# EAGLE board canSlaveV06a_nutzen (EAGLE 7.2.0), part 1 of 4
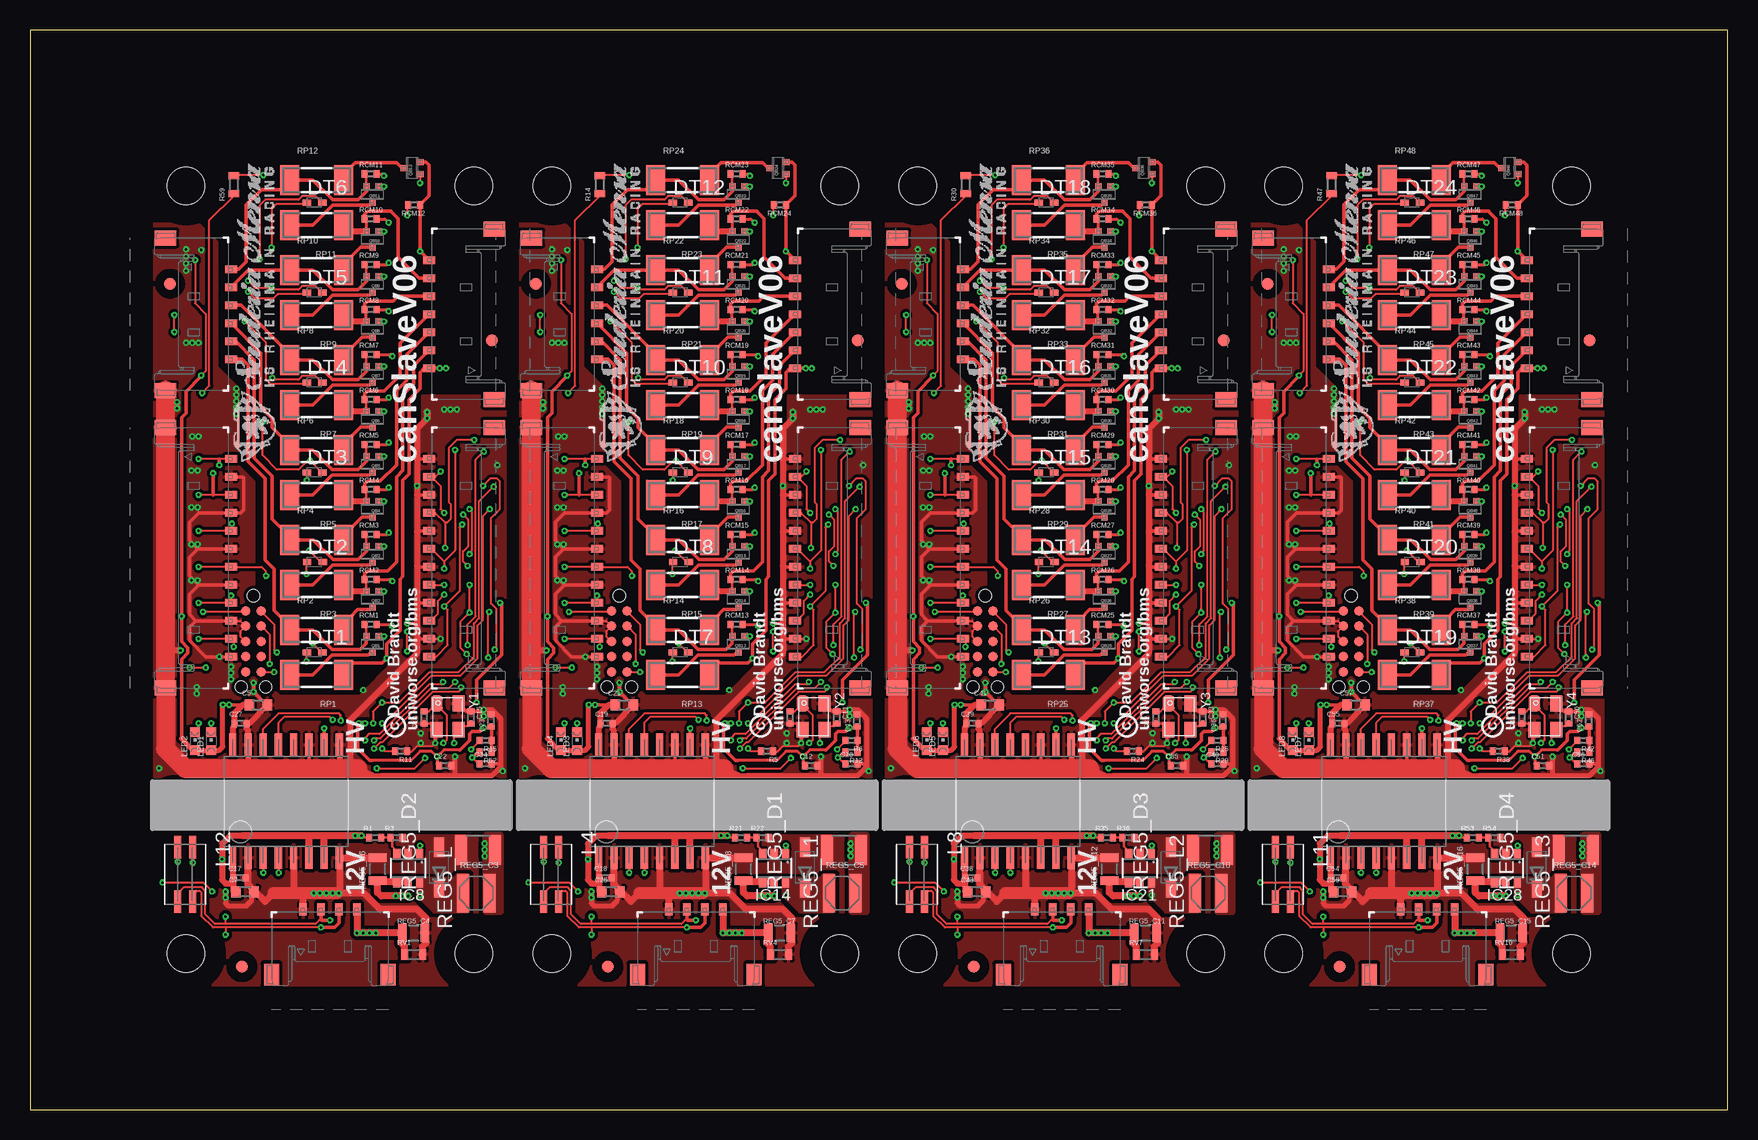
[diagram p0: board, top side]
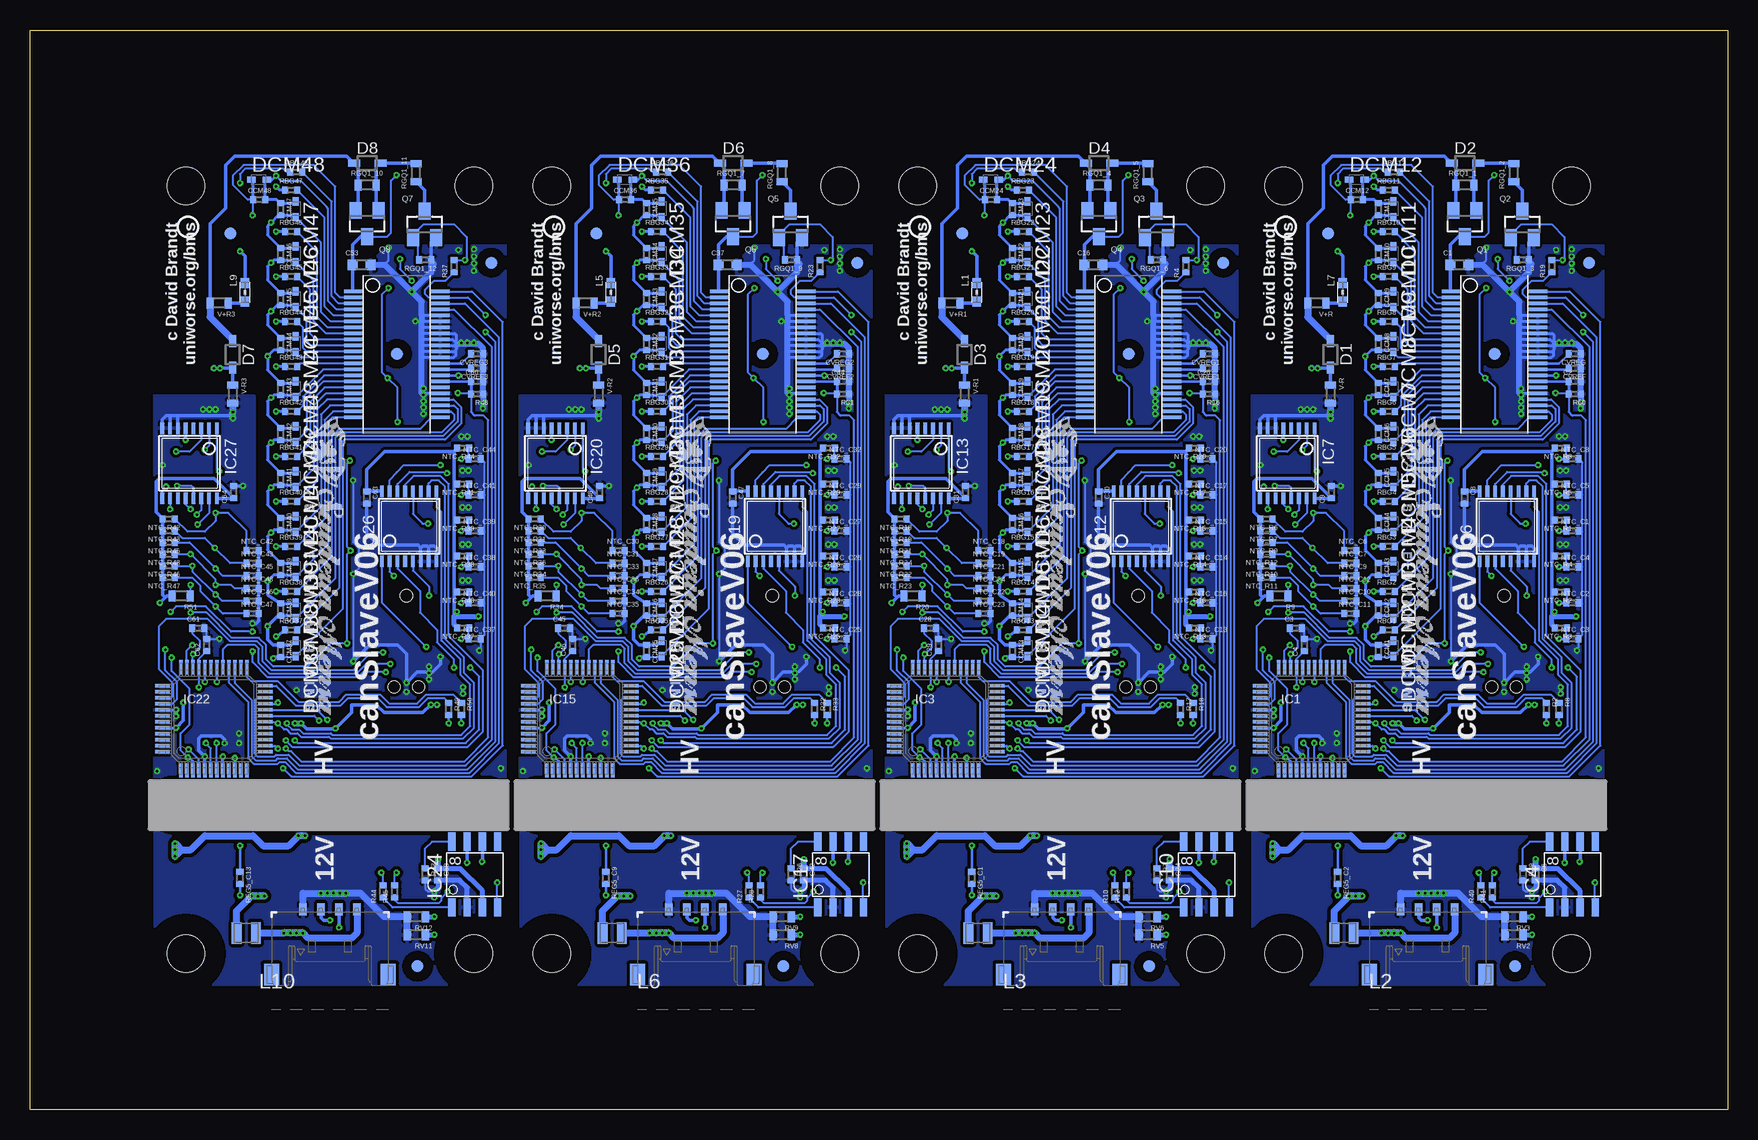
[diagram p1: board, bottom side, seen from below]

Size 141.5 x 90 mm. Coordinates in mm from the lower left corner, seen from the top.
Outline: 0,0 141.5,0 141.5,90 0,90 0,0
Copper layers (1*16): Top 0.035mm / dielectric 1.5mm / Bottom 0.035mm
Design rules "PCB-POOL Standard *": minimum track width 0.15mm, minimum drill 0.2mm, track to track 0.15mm, track to pad 0.15mm, pad to pad 0.15mm, via to via 0.15mm, smd to smd 0mil, copper to edge 0.3mm, drill to drill 0.2mm, minimum pad ring 0.2mm, minimum via ring 0.15mm, stop-mask expansion 0.075mm, vias tented up to drill 0.31mm, thermal gap 0.2mm
Holes 3.1 mm at 37,13 13,13 37,77 13,77 67.5,13 43.5,13 67.5,77 43.5,77 98,13 74,13 98,77 74,77 128.5,13 104.5,13 128.5,77 104.5,77
tRestrict: area 34,10 to 40,16; area 10,10 to 16,16; area 34,74 to 40,80; area 10,74 to 16,80; area 64.5,10 to 70.5,16; area 40.5,10 to 46.5,16; area 64.5,74 to 70.5,80; area 40.5,74 to 46.5,80; area 95,10 to 101,16; area 71,10 to 77,16; area 95,74 to 101,80; area 71,74 to 77,80; 4 more areas; 13 lines
bRestrict: area 34,10 to 40,16; area 10,10 to 16,16; area 34,74 to 40,80; area 10,74 to 16,80; area 64.5,10 to 70.5,16; area 40.5,10 to 46.5,16; area 64.5,74 to 70.5,80; area 40.5,74 to 46.5,80; area 95,10 to 101,16; area 71,10 to 77,16; area 95,74 to 101,80; area 71,74 to 77,80; 4 more areas; 11 lines

## Footprints (pad centres in the part's own frame; a part is rotated, then mirrored left to right if it is on the bottom)
C0603 = smd 0.8 x 0.9: 1 -0.75,0; 2 0.75,0
C0402 = smd 0.5 x 0.6: 1 -0.5,0; 2 0.5,0
SOD323-L = smd 1 x 0.6: A 1.1,0; C -1.1,0
TC2050-NL-JTORDER = smd 0.787 x 0.787: 1 -2.54,-0.635; 2 -2.54,0.635; 3 -1.27,-0.635; 4 -1.27,0.635; 5 0,-0.635; 6 0,0.635; 7 1.27,-0.635; 8 1.27,0.635; 9 2.54,-0.635; 10 2.54,0.635 | hole 0.991: 3.81,1.016; 3.81,-1.016; -3.81,0
SOD523 = smd 0.7 x 0.5: A 0.65,0; C -0.65,0
FIDUCIAL_1MM = smd 1 x 1: 1 0,0
LQFP48 = smd 0.28 x 1.2: 1 -2.75,-4.3; 2 -2.25,-4.3; 3 -1.75,-4.3; 4 -1.25,-4.3; 5 -0.75,-4.3; 6 -0.25,-4.3; 7 0.25,-4.3; 8 0.75,-4.3; 9 1.25,-4.3; 10 1.75,-4.3; 11 2.25,-4.3; 12 2.75,-4.3; 25 2.75,4.3; 26 2.25,4.3; 27 1.75,4.3; 28 1.25,4.3; 29 0.75,4.3; 30 0.25,4.3; 31 -0.25,4.3; 32 -0.75,4.3; 33 -1.25,4.3; 34 -1.75,4.3; 35 -2.25,4.3; 36 -2.75,4.3 | smd 1.2 x 0.28: 13 4.3,-2.75; 14 4.3,-2.25; 15 4.3,-1.75; 16 4.3,-1.25; 17 4.3,-0.75; 18 4.3,-0.25; 19 4.3,0.25; 20 4.3,0.75; 21 4.3,1.25; 22 4.3,1.75; 23 4.3,2.25; 24 4.3,2.75; 37 -4.3,2.75; 38 -4.3,2.25; 39 -4.3,1.75; 40 -4.3,1.25; 41 -4.3,0.75; 42 -4.3,0.25; 43 -4.3,-0.25; 44 -4.3,-0.75; 45 -4.3,-1.25; 46 -4.3,-1.75; 47 -4.3,-2.25; 48 -4.3,-2.75
44SSOP = smd 1.6 x 0.28: 1 -3.6,5.25; 2 -3.6,4.75; 3 -3.6,4.25; 4 -3.6,3.75; 5 -3.6,3.25; 6 -3.6,2.75; 7 -3.6,2.25; 8 -3.6,1.75; 9 -3.6,1.25; 10 -3.6,0.75; 11 -3.6,0.25; 12 -3.6,-0.25; 13 -3.6,-0.75; 14 -3.6,-1.25; 15 -3.6,-1.75; 16 -3.6,-2.25; 17 -3.6,-2.75; 18 -3.6,-3.25; 19 -3.6,-3.75; 20 -3.6,-4.25; 21 -3.6,-4.75; 22 -3.6,-5.25; 23 3.6,-5.25; 24 3.6,-4.75; 25 3.6,-4.25; 26 3.6,-3.75; 27 3.6,-3.25; 28 3.6,-2.75; 29 3.6,-2.25; 30 3.6,-1.75; 31 3.6,-1.25; 32 3.6,-0.75; 33 3.6,-0.25; 34 3.6,0.25; 35 3.6,0.75; 36 3.6,1.25; 37 3.6,1.75; 38 3.6,2.25; 39 3.6,2.75; 40 3.6,3.25; 41 3.6,3.75; 42 3.6,4.25; 43 3.6,4.75; 44 3.6,5.25
SO-8 = smd 1.524 x 0.61: 1 -2.743,1.905; 2 -2.743,0.635; 3 -2.743,-0.635; 4 -2.743,-1.905; 5 2.743,-1.905; 6 2.743,-0.635; 7 2.743,0.635; 8 2.743,1.905
SO16WB = smd 1.9 x 0.6: P$1 -4.7,4.445; P$2 -4.7,3.175; P$3 -4.7,1.905; P$4 -4.7,0.635; P$5 -4.7,-0.635; P$6 -4.7,-1.905; P$7 -4.7,-3.175; P$8 -4.7,-4.445; P$9 4.7,-4.445; P$10 4.7,-3.175; P$11 4.7,-1.905; P$12 4.7,-0.635; P$13 4.7,0.635; P$14 4.7,1.905; P$15 4.7,3.175; P$16 4.7,4.445
TSSOP16 = smd 0.305 x 0.991: 1 -2.275,-2.918; 2 -1.625,-2.918; 3 -0.975,-2.918; 4 -0.325,-2.918; 5 0.325,-2.918; 6 0.975,-2.918; 7 1.625,-2.918; 8 2.275,-2.918; 9 2.275,2.918; 10 1.625,2.918; 11 0.975,2.918; 12 0.325,2.918; 13 -0.325,2.918; 14 -0.975,2.918; 15 -1.625,2.918; 16 -2.275,2.918
SOT23-6 = smd 0.6 x 0.9: 1 -0.95,-1.15; 2 0,-1.15; 3 0.95,-1.15; 4 0.95,1.15; 5 0,1.15; 6 -0.95,1.15
0603 = smd 0.85 x 0.7: 1 -0.775,0; 2 0.775,0
WE-PMI_0806 = smd 0.8 x 1.8: 1 -0.8,0; 2 0.8,0
WE-SLM = smd 1.85 x 0.6: 1 -2.28,0.63; 2 -2.28,-0.62; 3 2.27,-0.62; 4 2.27,0.63
CHIPLED_0603 = smd 0.8 x 0.8: A 0,-0.75; C 0,0.75
R0402 = smd 0.5 x 0.6: 1 -0.5,0; 2 0.5,0
SOT23 = smd 1 x 1.4: 1 -0.95,-1.1; 2 0.95,-1.1; 3 0,1.1
SOT416 = smd 0.5 x 0.6: 1 -0.5,-0.65; 2 0.5,-0.65; 3 0,0.65
R0603 = smd 0.6 x 0.9: 1 -0.75,0; 2 0.75,0
C1210 = smd 1 x 2.5: 1 -1.4,0; 2 1.4,0
C0805 = smd 0.7 x 1.5: 1 -0.95,0; 2 0.95,0
SOD123 = smd 1.6 x 0.8: 1 -1.7,0; 2 1.7,0
WE-TPC_2828 = smd 3.2 x 1: 1 0,1.1; 2 0,-1.1
MINI_MELF-0207R = smd 1.6 x 2.5: 1 -2.25,0; 2 2.25,0
504050-0791 = smd 0.6 x 1: 1 -4.5,-0.25; 2 -3,-0.25; 3 -1.5,-0.25; 4 0,-0.25; 5 1.5,-0.25; 6 3,-0.25; 7 4.5,-0.25 | smd 1.25 x 1.8: P1 -7.105,5.2; P2 7.105,5.2
504050-0691 = smd 0.6 x 1: 1 -3.75,-0.25; 2 -2.25,-0.25; 3 -0.75,-0.25; 4 0.75,-0.25; 5 2.25,-0.25; 6 3.75,-0.25 | smd 1.25 x 1.8: P1 -6.355,5.2; P2 6.355,5.2
504050-0491 = smd 0.6 x 1: 1 -2.25,-0.25; 2 -0.75,-0.25; 3 0.75,-0.25; 4 2.25,-0.25 | smd 1.25 x 1.8: P1 -4.855,5.2; P2 4.855,5.2
504050-1291 = smd 0.6 x 1: 1 -8.25,-0.25; 2 -6.75,-0.25; 3 -5.25,-0.25; 4 -3.75,-0.25; 5 -2.25,-0.25; 6 -0.75,-0.25; 7 0.75,-0.25; 8 2.25,-0.25; 9 3.75,-0.25; 10 5.25,-0.25; 11 6.75,-0.25; 12 8.25,-0.25 | smd 1.25 x 1.8: P1 -10.855,5.2; P2 10.855,5.2
MT = smd 1.3 x 1: P1 -1.1,-0.9; P2 1.1,-0.9; P3 1.1,0.9; P4 -1.1,0.9

## Placement (x,y rotation side)
C1  100n,100V  [C0603]  22.36,70.42 0 bottom
C2  100n  [C0402]  12.75,60.7 0 bottom
C3  100n  [C0402]  35.98,40.12 0 bottom
C4  100n  [C0402]  35.27,38.73 90 bottom
C5  10u,10V,X7R  [C0603]  19.02,33.73 0 top
C6  100n,>10V,X7R  [C0402]  16,19.6 270 bottom
C7  10u,10V,X7R  [C0603]  17.93,18.15 0 top
C8  100n,>10V,X7R  [C0402]  21.93,51.02 270 bottom
C9  100n,>10V,X7R  [C0402]  33.02,51.48 90 bottom
C10  10p  [C0402]  63.35,32.67 90 top
C11  10p  [C0402]  67.25,32.67 270 top
C12  100n  [C0402]  65.1,28.68 0 top
C13  100n  [C0402]  68.92,32.42 90 top
C14  10p  [C0402]  32.85,32.67 90 top
C15  10p  [C0402]  36.75,32.67 270 top
C16  100n,100V  [C0603]  52.86,70.42 0 bottom
C17  100n,>10V,X7R  [C0402]  17.48,19.32 0 top
C18  100n,>10V,X7R  [C0402]  47.98,19.32 0 top
C19  100n,>10V,X7R  [C0402]  48.05,32.2 0 top
C20  100n  [C0402]  68.47,28.82 0 top
C21  10u,10V,X7R  [C0603]  49.52,33.73 0 top
C22  100n  [C0402]  34.6,28.68 0 top
C23  100n  [C0402]  38.42,32.42 90 top
C24  100n,>10V,X7R  [C0402]  46.5,19.6 270 bottom
C25  10u,10V,X7R  [C0603]  48.42,18.15 0 top
C26  100n  [C0402]  43.25,60.7 0 bottom
C27  100n,>10V,X7R  [C0402]  17.55,32.2 0 top
C28  100n  [C0402]  66.47,40.12 0 bottom
C29  100n  [C0402]  65.78,38.73 90 bottom
C30  100n,>10V,X7R  [C0402]  52.42,51.02 270 bottom
C31  100n,>10V,X7R  [C0402]  63.52,51.48 90 bottom
C32  10p  [C0402]  93.85,32.67 90 top
C33  10p  [C0402]  97.75,32.67 270 top
C34  100n  [C0402]  37.98,28.82 0 top
C35  100n  [C0402]  95.6,28.68 0 top
C36  100n  [C0402]  99.42,32.42 90 top
C37  100n,100V  [C0603]  83.36,70.42 0 bottom
C38  100n,>10V,X7R  [C0402]  78.47,19.32 0 top
C39  100n,>10V,X7R  [C0402]  78.55,32.2 0 top
C40  100n  [C0402]  98.97,28.82 0 top
C41  10u,10V,X7R  [C0603]  80.03,33.73 0 top
C42  100n,>10V,X7R  [C0402]  77,19.6 270 bottom
C43  10u,10V,X7R  [C0603]  78.92,18.15 0 top
C44  100n  [C0402]  73.75,60.7 0 bottom
C45  100n  [C0402]  96.97,40.12 0 bottom
C46  100n  [C0402]  96.28,38.73 90 bottom
C47  100n,>10V,X7R  [C0402]  82.92,51.02 270 bottom
C48  100n,>10V,X7R  [C0402]  94.03,51.48 90 bottom
C49  10p  [C0402]  124.35,32.67 90 top
C50  10p  [C0402]  128.25,32.67 270 top
C51  100n  [C0402]  126.1,28.68 0 top
C52  100n  [C0402]  129.93,32.42 90 top
C53  100n,100V  [C0603]  113.86,70.42 0 bottom
C54  100n,>10V,X7R  [C0402]  108.97,19.32 0 top
C55  100n,>10V,X7R  [C0402]  109.05,32.2 0 top
C56  100n  [C0402]  129.47,28.82 0 top
C57  10u,10V,X7R  [C0603]  110.53,33.73 0 top
C58  100n,>10V,X7R  [C0402]  107.5,19.6 270 bottom
C59  10u,10V,X7R  [C0603]  109.42,18.15 0 top
C60  100n  [C0402]  104.25,60.7 0 bottom
C61  100n  [C0402]  127.47,40.12 0 bottom
C62  100n  [C0402]  126.78,38.73 90 bottom
C63  100n,>10V,X7R  [C0402]  113.42,51.02 270 bottom
C64  100n,>10V,X7R  [C0402]  124.53,51.48 90 bottom
CCM1  100n  [C0402]  29.1,38.23 270 bottom
CCM2  100n  [C0402]  29.1,41.67 270 bottom
CCM3  100n  [C0402]  29.1,45.05 270 bottom
CCM4  100n  [C0402]  29.1,48.8 270 bottom
CCM5  100n  [C0402]  29.1,52.55 270 bottom
CCM6  100n  [C0402]  29.1,56.3 270 bottom
CCM7  100n  [C0402]  29.1,60.05 270 bottom
CCM8  100n  [C0402]  29.1,63.8 270 bottom
CCM9  100n  [C0402]  29.1,67.55 270 bottom
CCM10  100n  [C0402]  29.1,71.3 270 bottom
CCM11  100n  [C0402]  29.1,75.05 270 bottom
CCM12  100n  [C0402]  30.9,75.85 0 bottom
CCM13  100n  [C0402]  59.6,38.23 270 bottom
CCM14  100n  [C0402]  59.6,41.67 270 bottom
CCM15  100n  [C0402]  59.6,45.05 270 bottom
CCM16  100n  [C0402]  59.6,48.8 270 bottom
CCM17  100n  [C0402]  59.6,52.55 270 bottom
CCM18  100n  [C0402]  59.6,56.3 270 bottom
CCM19  100n  [C0402]  59.6,60.05 270 bottom
CCM20  100n  [C0402]  59.6,63.8 270 bottom
CCM21  100n  [C0402]  59.6,67.55 270 bottom
CCM22  100n  [C0402]  59.6,71.3 270 bottom
CCM23  100n  [C0402]  59.6,75.05 270 bottom
CCM24  100n  [C0402]  61.4,75.85 0 bottom
CCM25  100n  [C0402]  90.1,38.23 270 bottom
CCM26  100n  [C0402]  90.1,41.67 270 bottom
CCM27  100n  [C0402]  90.1,45.05 270 bottom
CCM28  100n  [C0402]  90.1,48.8 270 bottom
CCM29  100n  [C0402]  90.1,52.55 270 bottom
CCM30  100n  [C0402]  90.1,56.3 270 bottom
CCM31  100n  [C0402]  90.1,60.05 270 bottom
CCM32  100n  [C0402]  90.1,63.8 270 bottom
CCM33  100n  [C0402]  90.1,67.55 270 bottom
CCM34  100n  [C0402]  90.1,71.3 270 bottom
CCM35  100n  [C0402]  90.1,75.05 270 bottom
CCM36  100n  [C0402]  91.9,75.85 0 bottom
CCM37  100n  [C0402]  120.6,38.23 270 bottom
CCM38  100n  [C0402]  120.6,41.67 270 bottom
CCM39  100n  [C0402]  120.6,45.05 270 bottom
CCM40  100n  [C0402]  120.6,48.8 270 bottom
CCM41  100n  [C0402]  120.6,52.55 270 bottom
CCM42  100n  [C0402]  120.6,56.3 270 bottom
CCM43  100n  [C0402]  120.6,60.05 270 bottom
CCM44  100n  [C0402]  120.6,63.8 270 bottom
CCM45  100n  [C0402]  120.6,67.55 270 bottom
CCM46  100n  [C0402]  120.6,71.3 270 bottom
CCM47  100n  [C0402]  120.6,75.05 270 bottom
CCM48  100n  [C0402]  122.4,75.85 0 bottom
CVREF  1u  [C0402]  12.75,61.8 180 bottom
CVREF1  1u  [C0402]  43.25,61.8 180 bottom
CVREF2  1u  [C0402]  73.75,61.8 180 bottom
CVREF3  1u  [C0402]  104.25,61.8 180 bottom
CVREG  1u  [C0402]  12.75,63 180 bottom
CVREG1  1u  [C0402]  43.25,63 180 bottom
CVREG2  1u  [C0402]  73.75,63 180 bottom
CVREG3  1u  [C0402]  104.25,63 180 bottom
D1  51V  [SOD323-L]  33.1,62.95 270 bottom
D2  12V  [SOD323-L]  21.89,78.89 0 bottom
D3  51V  [SOD323-L]  63.6,62.95 270 bottom
D4  12V  [SOD323-L]  52.39,78.89 0 bottom
D5  51V  [SOD323-L]  94.1,62.95 270 bottom
D6  12V  [SOD323-L]  82.89,78.89 0 bottom
D7  51V  [SOD323-L]  124.6,62.95 270 bottom
D8  12V  [SOD323-L]  113.39,78.89 0 bottom
DBG1  JTAG10-TC2050-NL  [TC2050-NL-JTORDER]  18.62,39.02 270 top
DBG2  JTAG10-TC2050-NL  [TC2050-NL-JTORDER]  49.12,39.02 270 top
DBG3  JTAG10-TC2050-NL  [TC2050-NL-JTORDER]  79.62,39.02 270 top
DBG4  JTAG10-TC2050-NL  [TC2050-NL-JTORDER]  110.12,39.02 270 top
DCM1  7.5  [SOD523]  27.88,38.45 270 bottom
DCM2  7.5  [SOD523]  27.88,41.6 270 bottom
DCM3  7.5  [SOD523]  27.88,45.05 270 bottom
DCM4  7.5  [SOD523]  27.88,48.8 270 bottom
DCM5  7.5  [SOD523]  27.88,52.55 270 bottom
DCM6  7.5  [SOD523]  27.88,56.3 270 bottom
DCM7  7.5  [SOD523]  27.88,60.05 270 bottom
DCM8  7.5  [SOD523]  27.88,63.8 270 bottom
DCM9  7.5  [SOD523]  27.88,67.55 270 bottom
DCM10  7.5  [SOD523]  27.88,71.3 270 bottom
DCM11  7.5  [SOD523]  27.88,75.05 270 bottom
DCM12  7.5  [SOD523]  30.9,77.53 0 bottom
DCM13  7.5  [SOD523]  58.38,38.45 270 bottom
DCM14  7.5  [SOD523]  58.38,41.6 270 bottom
DCM15  7.5  [SOD523]  58.38,45.05 270 bottom
DCM16  7.5  [SOD523]  58.38,48.8 270 bottom
DCM17  7.5  [SOD523]  58.38,52.55 270 bottom
DCM18  7.5  [SOD523]  58.38,56.3 270 bottom
DCM19  7.5  [SOD523]  58.38,60.05 270 bottom
DCM20  7.5  [SOD523]  58.38,63.8 270 bottom
DCM21  7.5  [SOD523]  58.38,67.55 270 bottom
DCM22  7.5  [SOD523]  58.38,71.3 270 bottom
DCM23  7.5  [SOD523]  58.38,75.05 270 bottom
DCM24  7.5  [SOD523]  61.4,77.53 0 bottom
DCM25  7.5  [SOD523]  88.88,38.45 270 bottom
DCM26  7.5  [SOD523]  88.88,41.6 270 bottom
DCM27  7.5  [SOD523]  88.88,45.05 270 bottom
DCM28  7.5  [SOD523]  88.88,48.8 270 bottom
DCM29  7.5  [SOD523]  88.88,52.55 270 bottom
DCM30  7.5  [SOD523]  88.88,56.3 270 bottom
DCM31  7.5  [SOD523]  88.88,60.05 270 bottom
DCM32  7.5  [SOD523]  88.88,63.8 270 bottom
DCM33  7.5  [SOD523]  88.88,67.55 270 bottom
DCM34  7.5  [SOD523]  88.88,71.3 270 bottom
DCM35  7.5  [SOD523]  88.88,75.05 270 bottom
DCM36  7.5  [SOD523]  91.9,77.53 0 bottom
DCM37  7.5  [SOD523]  119.38,38.45 270 bottom
DCM38  7.5  [SOD523]  119.38,41.6 270 bottom
DCM39  7.5  [SOD523]  119.38,45.05 270 bottom
DCM40  7.5  [SOD523]  119.38,48.8 270 bottom
DCM41  7.5  [SOD523]  119.38,52.55 270 bottom
DCM42  7.5  [SOD523]  119.38,56.3 270 bottom
DCM43  7.5  [SOD523]  119.38,60.05 270 bottom
DCM44  7.5  [SOD523]  119.38,63.8 270 bottom
DCM45  7.5  [SOD523]  119.38,67.55 270 bottom
DCM46  7.5  [SOD523]  119.38,71.3 270 bottom
DCM47  7.5  [SOD523]  119.38,75.05 270 bottom
DCM48  7.5  [SOD523]  122.4,77.53 0 bottom
DT1  1PS79SB40  [SOD523]  23.73,38.12 0 top
DT2  1PS79SB40  [SOD523]  23.75,45.65 0 top
DT3  1PS79SB40  [SOD523]  23.73,53.12 0 top
DT4  1PS79SB40  [SOD523]  23.73,60.62 0 top
DT5  1PS79SB40  [SOD523]  23.73,68.12 0 top
DT6  1PS79SB40  [SOD523]  23.73,75.62 0 top
DT7  1PS79SB40  [SOD523]  54.23,38.12 0 top
DT8  1PS79SB40  [SOD523]  54.25,45.65 0 top
DT9  1PS79SB40  [SOD523]  54.23,53.12 0 top
DT10  1PS79SB40  [SOD523]  54.23,60.62 0 top
DT11  1PS79SB40  [SOD523]  54.23,68.12 0 top
DT12  1PS79SB40  [SOD523]  54.23,75.62 0 top
DT13  1PS79SB40  [SOD523]  84.72,38.12 0 top
DT14  1PS79SB40  [SOD523]  84.75,45.65 0 top
DT15  1PS79SB40  [SOD523]  84.72,53.12 0 top
DT16  1PS79SB40  [SOD523]  84.72,60.62 0 top
DT17  1PS79SB40  [SOD523]  84.72,68.12 0 top
DT18  1PS79SB40  [SOD523]  84.72,75.62 0 top
DT19  1PS79SB40  [SOD523]  115.22,38.12 0 top
DT20  1PS79SB40  [SOD523]  115.25,45.65 0 top
DT21  1PS79SB40  [SOD523]  115.22,53.12 0 top
DT22  1PS79SB40  [SOD523]  115.22,60.62 0 top
DT23  1PS79SB40  [SOD523]  115.22,68.12 0 top
DT24  1PS79SB40  [SOD523]  115.22,75.62 0 top
FID1  FIDUCIAL""  [FIDUCIAL_1MM]  48.17,11.91 90 top
FID2  FIDUCIAL""  [FIDUCIAL_1MM]  17.67,11.91 90 top
FID3  FIDUCIAL""  [FIDUCIAL_1MM]  38.52,64.12 90 top
FID4  FIDUCIAL""  [FIDUCIAL_1MM]  11.68,68.85 90 top
FID5  FIDUCIAL""  [FIDUCIAL_1MM]  69.02,64.12 90 top
FID6  FIDUCIAL""  [FIDUCIAL_1MM]  42.05,70.6 270 bottom
FID7  FIDUCIAL""  [FIDUCIAL_1MM]  11.55,70.6 270 bottom
FID8  FIDUCIAL""  [FIDUCIAL_1MM]  17.69,11.95 270 bottom
FID9  FIDUCIAL""  [FIDUCIAL_1MM]  19.4,63 270 bottom
FID10  FIDUCIAL""  [FIDUCIAL_1MM]  33.27,73.05 270 bottom
FID11  FIDUCIAL""  [FIDUCIAL_1MM]  48.19,11.95 270 bottom
FID12  FIDUCIAL""  [FIDUCIAL_1MM]  42.17,68.85 90 top
FID13  FIDUCIAL""  [FIDUCIAL_1MM]  49.9,63 270 bottom
FID14  FIDUCIAL""  [FIDUCIAL_1MM]  63.77,73.05 270 bottom
FID15  FIDUCIAL""  [FIDUCIAL_1MM]  78.67,11.91 90 top
FID16  FIDUCIAL""  [FIDUCIAL_1MM]  99.52,64.12 90 top
FID17  FIDUCIAL""  [FIDUCIAL_1MM]  72.55,70.6 270 bottom
FID18  FIDUCIAL""  [FIDUCIAL_1MM]  78.69,11.95 270 bottom
FID19  FIDUCIAL""  [FIDUCIAL_1MM]  72.67,68.85 90 top
FID20  FIDUCIAL""  [FIDUCIAL_1MM]  80.4,63 270 bottom
FID21  FIDUCIAL""  [FIDUCIAL_1MM]  94.28,73.05 270 bottom
FID22  FIDUCIAL""  [FIDUCIAL_1MM]  109.17,11.91 90 top
FID23  FIDUCIAL""  [FIDUCIAL_1MM]  130.01,64.12 90 top
FID24  FIDUCIAL""  [FIDUCIAL_1MM]  103.05,70.6 270 bottom
FID25  FIDUCIAL""  [FIDUCIAL_1MM]  109.19,11.95 270 bottom
FID26  FIDUCIAL""  [FIDUCIAL_1MM]  103.17,68.85 90 top
FID27  FIDUCIAL""  [FIDUCIAL_1MM]  110.9,63 270 bottom
FID28  FIDUCIAL""  [FIDUCIAL_1MM]  124.78,73.05 270 bottom
IC1  LPC11C14  [LQFP48]  34.67,32.58 0 bottom
IC2  LTC6803-4  [44SSOP]  19.43,62.96 0 bottom
IC3  LPC11C14  [LQFP48]  65.17,32.58 0 bottom
IC4  PCA82C251  [SO-8]  12.93,19.59 90 bottom
IC5  ADUM5201  [SO16WB]  21.35,25.7 90 top
IC6  4052-TSSOP16  [TSSOP16]  18.4,48.62 0 bottom
IC7  4052-TSSOP16  [TSSOP16]  36.7,53.88 180 bottom
IC8  LMR14203  [SOT23-6]  31.52,20.12 180 top
IC9  LTC6803-4  [44SSOP]  49.93,62.96 0 bottom
IC10  PCA82C251  [SO-8]  43.42,19.59 90 bottom
IC11  ADUM5201  [SO16WB]  51.85,25.7 90 top
IC12  4052-TSSOP16  [TSSOP16]  48.9,48.62 0 bottom
IC13  4052-TSSOP16  [TSSOP16]  67.2,53.88 180 bottom
IC14  LMR14203  [SOT23-6]  62.02,20.12 180 top
IC15  LPC11C14  [LQFP48]  95.67,32.58 0 bottom
IC16  LTC6803-4  [44SSOP]  80.43,62.96 0 bottom
IC17  PCA82C251  [SO-8]  73.92,19.59 90 bottom
IC18  ADUM5201  [SO16WB]  82.35,25.7 90 top
IC19  4052-TSSOP16  [TSSOP16]  79.4,48.62 0 bottom
IC20  4052-TSSOP16  [TSSOP16]  97.7,53.88 180 bottom
IC21  LMR14203  [SOT23-6]  92.53,20.12 180 top
IC22  LPC11C14  [LQFP48]  126.17,32.58 0 bottom
IC23  LTC6803-4  [44SSOP]  110.93,62.96 0 bottom
IC24  PCA82C251  [SO-8]  104.42,19.59 90 bottom
IC25  ADUM5201  [SO16WB]  112.85,25.7 90 top
IC26  4052-TSSOP16  [TSSOP16]  109.9,48.62 0 bottom
IC27  4052-TSSOP16  [TSSOP16]  128.2,53.88 180 bottom
IC28  LMR14203  [SOT23-6]  123.03,20.12 180 top
L1  WE-CBF,742792664  [0603]  62.58,68.13 270 bottom
L2  WE-PMI/74479776233A  [WE-PMI_0806]  31.98,14.72 180 bottom
L3  WE-PMI/74479776233A  [WE-PMI_0806]  62.48,14.72 180 bottom
L4  744242101  [WE-SLM]  43.42,19.6 270 top
L5  WE-CBF,742792664  [0603]  93.08,68.13 270 bottom
L6  WE-PMI/74479776233A  [WE-PMI_0806]  92.97,14.72 180 bottom
L7  WE-CBF,742792664  [0603]  32.08,68.13 270 bottom
L8  744242101  [WE-SLM]  73.92,19.6 270 top
L9  WE-CBF,742792664  [0603]  123.58,68.13 270 bottom
L10  WE-PMI/74479776233A  [WE-PMI_0806]  123.47,14.72 180 bottom
L11  744242101  [WE-SLM]  104.42,19.6 270 top
L12  744242101  [WE-SLM]  12.93,19.6 270 top
LED1  GRN  [CHIPLED_0603]  15.1,30.7 0 top
LED2  RED  [CHIPLED_0603]  13.75,30.7 0 top
LED3  GRN  [CHIPLED_0603]  45.6,30.7 0 top
LED4  RED  [CHIPLED_0603]  44.25,30.7 0 top
LED5  GRN  [CHIPLED_0603]  76.1,30.7 0 top
LED6  RED  [CHIPLED_0603]  74.75,30.7 0 top
LED7  GRN  [CHIPLED_0603]  106.6,30.7 0 top
LED8  RED  [CHIPLED_0603]  105.25,30.7 0 top
NTC_C1  1u  [C0402]  12.93,48.25 0 bottom
NTC_C2  1u  [C0402]  12.93,42.25 0 bottom
NTC_C3  1u  [C0402]  12.93,39.25 0 bottom
NTC_C4  1u  [C0402]  12.93,45.25 0 bottom
NTC_C5  1u  [C0402]  12.93,51.25 0 bottom
NTC_C6  1u  [C0402]  31.45,46.6 0 bottom
NTC_C7  1u  [C0402]  31.45,45.55 0 bottom
NTC_C8  1u  [C0402]  12.93,54.25 0 bottom
NTC_C9  1u  [C0402]  31.45,44.5 0 bottom
NTC_C10  1u  [C0402]  31.45,42.4 0 bottom
NTC_C11  1u  [C0402]  31.45,41.35 0 bottom
NTC_C12  1u  [C0402]  31.45,43.45 0 bottom
NTC_C13  1u  [C0402]  43.42,39.25 0 bottom
NTC_C14  1u  [C0402]  43.42,45.25 0 bottom
NTC_C15  1u  [C0402]  43.42,48.25 0 bottom
NTC_C16  1u  [C0402]  43.42,42.25 0 bottom
NTC_C17  1u  [C0402]  43.42,51.25 0 bottom
NTC_C18  1u  [C0402]  61.95,46.6 0 bottom
NTC_C19  1u  [C0402]  61.95,45.55 0 bottom
NTC_C20  1u  [C0402]  43.42,54.25 0 bottom
NTC_C21  1u  [C0402]  61.95,44.5 0 bottom
NTC_C22  1u  [C0402]  61.95,42.4 0 bottom
NTC_C23  1u  [C0402]  61.95,41.35 0 bottom
NTC_C24  1u  [C0402]  61.95,43.45 0 bottom
NTC_C25  1u  [C0402]  73.92,39.25 0 bottom
NTC_C26  1u  [C0402]  73.92,45.25 0 bottom
NTC_C27  1u  [C0402]  73.92,48.25 0 bottom
NTC_C28  1u  [C0402]  73.92,42.25 0 bottom
NTC_C29  1u  [C0402]  73.92,51.25 0 bottom
NTC_C30  1u  [C0402]  92.45,46.6 0 bottom
NTC_C31  1u  [C0402]  92.45,45.55 0 bottom
NTC_C32  1u  [C0402]  73.92,54.25 0 bottom
NTC_C33  1u  [C0402]  92.45,44.5 0 bottom
NTC_C34  1u  [C0402]  92.45,42.4 0 bottom
NTC_C35  1u  [C0402]  92.45,41.35 0 bottom
NTC_C36  1u  [C0402]  92.45,43.45 0 bottom
NTC_C37  1u  [C0402]  104.42,39.25 0 bottom
NTC_C38  1u  [C0402]  104.42,45.25 0 bottom
NTC_C39  1u  [C0402]  104.42,48.25 0 bottom
NTC_C40  1u  [C0402]  104.42,42.25 0 bottom
NTC_C41  1u  [C0402]  104.42,51.25 0 bottom
NTC_C42  1u  [C0402]  122.95,46.6 0 bottom
NTC_C43  1u  [C0402]  122.95,45.55 0 bottom
NTC_C44  1u  [C0402]  104.42,54.25 0 bottom
NTC_C45  1u  [C0402]  122.95,44.5 0 bottom
NTC_C46  1u  [C0402]  122.95,42.4 0 bottom
NTC_C47  1u  [C0402]  122.95,41.35 0 bottom
NTC_C48  1u  [C0402]  122.95,43.45 0 bottom
NTC_R1  10k  [R0402]  13.9,49.15 180 bottom
NTC_R2  10k  [R0402]  13.9,43.15 180 bottom
NTC_R3  10k  [R0402]  13.9,40.15 180 bottom
NTC_R4  10k  [R0402]  13.9,46.15 180 bottom
NTC_R5  10k  [R0402]  13.9,52.15 180 bottom
NTC_R6  10k  [R0402]  38.42,49.23 180 bottom
NTC_R7  10k  [R0402]  38.42,48.25 180 bottom
NTC_R8  10k  [R0402]  13.9,55.15 180 bottom
NTC_R9  10k  [R0402]  38.42,47.27 180 bottom
NTC_R10  10k  [R0402]  38.42,45.33 180 bottom
NTC_R11  10k  [R0402]  38.42,44.35 180 bottom
NTC_R12  10k  [R0402]  38.42,46.3 180 bottom
NTC_R13  10k  [R0402]  44.4,40.15 180 bottom
NTC_R14  10k  [R0402]  44.4,46.15 180 bottom
NTC_R15  10k  [R0402]  44.4,49.15 180 bottom
NTC_R16  10k  [R0402]  44.4,43.15 180 bottom
NTC_R17  10k  [R0402]  44.4,52.15 180 bottom
NTC_R18  10k  [R0402]  68.92,49.23 180 bottom
NTC_R19  10k  [R0402]  68.92,48.25 180 bottom
NTC_R20  10k  [R0402]  44.4,55.15 180 bottom
NTC_R21  10k  [R0402]  68.92,47.27 180 bottom
NTC_R22  10k  [R0402]  68.92,45.33 180 bottom
NTC_R23  10k  [R0402]  68.92,44.35 180 bottom
NTC_R24  10k  [R0402]  68.92,46.3 180 bottom
NTC_R25  10k  [R0402]  74.9,40.15 180 bottom
NTC_R26  10k  [R0402]  74.9,46.15 180 bottom
NTC_R27  10k  [R0402]  74.9,49.15 180 bottom
NTC_R28  10k  [R0402]  74.9,43.15 180 bottom
NTC_R29  10k  [R0402]  74.9,52.15 180 bottom
NTC_R30  10k  [R0402]  99.42,49.23 180 bottom
NTC_R31  10k  [R0402]  99.42,48.25 180 bottom
NTC_R32  10k  [R0402]  74.9,55.15 180 bottom
NTC_R33  10k  [R0402]  99.42,47.27 180 bottom
NTC_R34  10k  [R0402]  99.42,45.33 180 bottom
NTC_R35  10k  [R0402]  99.42,44.35 180 bottom
NTC_R36  10k  [R0402]  99.42,46.3 180 bottom
NTC_R37  10k  [R0402]  105.4,40.15 180 bottom
NTC_R38  10k  [R0402]  105.4,46.15 180 bottom
NTC_R39  10k  [R0402]  105.4,49.15 180 bottom
NTC_R40  10k  [R0402]  105.4,43.15 180 bottom
NTC_R41  10k  [R0402]  105.4,52.15 180 bottom
NTC_R42  10k  [R0402]  129.93,49.23 180 bottom
NTC_R43  10k  [R0402]  129.93,48.25 180 bottom
NTC_R44  10k  [R0402]  105.4,55.15 180 bottom
NTC_R45  10k  [R0402]  129.93,47.27 180 bottom
NTC_R46  10k  [R0402]  129.93,45.33 180 bottom
NTC_R47  10k  [R0402]  129.93,44.35 180 bottom
NTC_R48  10k  [R0402]  129.93,46.3 180 bottom
Q1  BSS84  [SOT23]  21.9,73.86 180 bottom
Q2  2N7002  [SOT23]  17.11,73.78 0 bottom
Q3  2N7002  [SOT23]  47.61,73.78 0 bottom
Q4  BSS84  [SOT23]  52.4,73.86 180 bottom
Q5  2N7002  [SOT23]  78.11,73.78 0 bottom
Q6  BSS84  [SOT23]  82.9,73.86 180 bottom
Q7  2N7002  [SOT23]  108.61,73.78 0 bottom
Q8  BSS84  [SOT23]  113.4,73.86 180 bottom
QB1  BSS84AKT  [SOT416]  28.55,38.8 180 top
QB2  BSS84AKT  [SOT416]  28.55,42.55 180 top
QB3  BSS84AKT  [SOT416]  28.55,46.3 180 top
QB4  BSS84AKT  [SOT416]  28.55,50.05 180 top
QB5  BSS84AKT  [SOT416]  28.55,53.8 180 top
QB6  BSS84AKT  [SOT416]  28.55,57.55 180 top
QB7  BSS84AKT  [SOT416]  28.55,61.3 180 top
QB8  BSS84AKT  [SOT416]  28.55,65.05 180 top
QB9  BSS84AKT  [SOT416]  28.55,68.8 180 top
QB10  BSS84AKT  [SOT416]  28.55,72.55 180 top
QB11  BSS84AKT  [SOT416]  28.55,76.3 180 top
QB12  BSS84AKT  [SOT416]  31.85,78.5 90 top
QB13  BSS84AKT  [SOT416]  59.05,38.8 180 top
QB14  BSS84AKT  [SOT416]  59.05,42.55 180 top
QB15  BSS84AKT  [SOT416]  59.05,46.3 180 top
QB16  BSS84AKT  [SOT416]  59.05,50.05 180 top
QB17  BSS84AKT  [SOT416]  59.05,53.8 180 top
QB18  BSS84AKT  [SOT416]  59.05,57.55 180 top
QB19  BSS84AKT  [SOT416]  59.05,61.3 180 top
QB20  BSS84AKT  [SOT416]  59.05,65.05 180 top
QB21  BSS84AKT  [SOT416]  59.05,68.8 180 top
QB22  BSS84AKT  [SOT416]  59.05,72.55 180 top
QB23  BSS84AKT  [SOT416]  59.05,76.3 180 top
QB24  BSS84AKT  [SOT416]  62.35,78.5 90 top
QB25  BSS84AKT  [SOT416]  89.55,38.8 180 top
QB26  BSS84AKT  [SOT416]  89.55,42.55 180 top
QB27  BSS84AKT  [SOT416]  89.55,46.3 180 top
QB28  BSS84AKT  [SOT416]  89.55,50.05 180 top
QB29  BSS84AKT  [SOT416]  89.55,53.8 180 top
QB30  BSS84AKT  [SOT416]  89.55,57.55 180 top
QB31  BSS84AKT  [SOT416]  89.55,61.3 180 top
QB32  BSS84AKT  [SOT416]  89.55,65.05 180 top
QB33  BSS84AKT  [SOT416]  89.55,68.8 180 top
QB34  BSS84AKT  [SOT416]  89.55,72.55 180 top
QB35  BSS84AKT  [SOT416]  89.55,76.3 180 top
QB36  BSS84AKT  [SOT416]  92.85,78.5 90 top
QB37  BSS84AKT  [SOT416]  120.05,38.8 180 top
QB38  BSS84AKT  [SOT416]  120.05,42.55 180 top
QB39  BSS84AKT  [SOT416]  120.05,46.3 180 top
QB40  BSS84AKT  [SOT416]  120.05,50.05 180 top
QB41  BSS84AKT  [SOT416]  120.05,53.8 180 top
QB42  BSS84AKT  [SOT416]  120.05,57.55 180 top
QB43  BSS84AKT  [SOT416]  120.05,61.3 180 top
QB44  BSS84AKT  [SOT416]  120.05,65.05 180 top
QB45  BSS84AKT  [SOT416]  120.05,68.8 180 top
QB46  BSS84AKT  [SOT416]  120.05,72.55 180 top
QB47  BSS84AKT  [SOT416]  120.05,76.3 180 top
QB48  BSS84AKT  [SOT416]  123.35,78.5 90 top
R1  5.62k  [R0402]  28.75,22.68 0 top
R2  1k  [R0402]  15.1,33.4 270 bottom
R3  1.02k  [R0402]  30.55,22.68 0 top
R4  4.7k  [R0402]  45.15,70.31 90 bottom
R5  10k  [R0402]  61.42,29.88 180 top
R6  10k  [R0402]  68.47,30.77 180 top
R7  0  [R0402]  47.55,19.61 270 bottom
R8  1k  [R0402]  14.05,33.4 270 bottom
R9  3.3k  [R0603]  37.4,42.83 180 bottom
R10  100  [R0402]  51.08,18.18 90 bottom
R11  10k  [R0402]  30.93,29.88 180 top
R12  100  [R0402]  50.1,18.18 90 bottom
R13  10k  [R0402]  68.47,29.8 180 top
R14  332k0.1%  [R0603]  47.5,77.1 90 top
R15  10k  [R0402]  37.98,30.77 180 top
R16  20k0.1%  [R0402]  43.25,59.65 180 bottom
R17  1k  [R0402]  45.6,33.4 270 bottom
R18  1k  [R0402]  44.55,33.4 270 bottom
R19  4.7k  [R0402]  14.65,70.31 90 bottom
R20  3.3k  [R0603]  67.9,42.83 180 bottom
R21  5.62k  [R0402]  59.25,22.68 0 top
R22  1.02k  [R0402]  61.05,22.68 0 top
R23  4.7k  [R0402]  75.65,70.31 90 bottom
R24  10k  [R0402]  91.92,29.88 180 top
R25  10k  [R0402]  98.97,30.77 180 top
R26  0  [R0402]  78.05,19.61 270 bottom
R27  100  [R0402]  81.58,18.18 90 bottom
R28  100  [R0402]  80.6,18.18 90 bottom
R29  10k  [R0402]  98.97,29.8 180 top
R30  332k0.1%  [R0603]  78,77.1 90 top
R31  20k0.1%  [R0402]  73.75,59.65 180 bottom
R32  1k  [R0402]  76.1,33.4 270 bottom
R33  1k  [R0402]  75.05,33.4 270 bottom
R34  3.3k  [R0603]  98.4,42.83 180 bottom
R35  5.62k  [R0402]  89.75,22.68 0 top
R36  1.02k  [R0402]  91.55,22.68 0 top
R37  4.7k  [R0402]  106.15,70.31 90 bottom
R38  10k  [R0402]  122.42,29.88 180 top
R39  0  [R0402]  17.05,19.61 270 bottom
R40  100  [R0402]  20.57,18.18 90 bottom
R41  100  [R0402]  19.6,18.18 90 bottom
R42  10k  [R0402]  129.47,30.77 180 top
R43  0  [R0402]  108.55,19.61 270 bottom
R44  100  [R0402]  112.08,18.18 90 bottom
R45  100  [R0402]  111.1,18.18 90 bottom
R46  10k  [R0402]  129.47,29.8 180 top
R47  332k0.1%  [R0603]  108.5,77.1 90 top
R48  20k0.1%  [R0402]  104.25,59.65 180 bottom
R49  1k  [R0402]  106.6,33.4 270 bottom
R50  1k  [R0402]  105.55,33.4 270 bottom
R51  3.3k  [R0603]  128.9,42.83 180 bottom
R52  10k  [R0402]  37.98,29.8 180 top
R53  5.62k  [R0402]  120.25,22.68 0 top
R54  1.02k  [R0402]  122.05,22.68 0 top
R59  332k0.1%  [R0603]  17,77.1 90 top
R60  20k0.1%  [R0402]  12.75,59.65 180 bottom
RBG1  3.3k  [R0402]  28.25,39.98 0 bottom
RBG2  3.3k  [R0402]  28.25,43.2 0 bottom
RBG3  3.3k  [R0402]  28.25,46.95 0 bottom
RBG4  3.3k  [R0402]  28.25,50.7 0 bottom
RBG5  3.3k  [R0402]  28.25,54.45 0 bottom
RBG6  3.3k  [R0402]  28.25,58.2 0 bottom
RBG7  3.3k  [R0402]  28.25,61.95 0 bottom
RBG8  3.3k  [R0402]  28.25,65.7 0 bottom
RBG9  3.3k  [R0402]  28.25,69.45 0 bottom
RBG10  3.3k  [R0402]  28.25,73.2 0 bottom
RBG11  3.3k  [R0402]  28.25,76.65 0 bottom
RBG12  3.3k  [R0402]  27.8,78.15 0 bottom
RBG13  3.3k  [R0402]  58.75,39.98 0 bottom
RBG14  3.3k  [R0402]  58.75,43.2 0 bottom
RBG15  3.3k  [R0402]  58.75,46.95 0 bottom
RBG16  3.3k  [R0402]  58.75,50.7 0 bottom
RBG17  3.3k  [R0402]  58.75,54.45 0 bottom
RBG18  3.3k  [R0402]  58.75,58.2 0 bottom
RBG19  3.3k  [R0402]  58.75,61.95 0 bottom
RBG20  3.3k  [R0402]  58.75,65.7 0 bottom
RBG21  3.3k  [R0402]  58.75,69.45 0 bottom
RBG22  3.3k  [R0402]  58.75,73.2 0 bottom
RBG23  3.3k  [R0402]  58.75,76.65 0 bottom
RBG24  3.3k  [R0402]  58.3,78.15 0 bottom
RBG25  3.3k  [R0402]  89.25,39.98 0 bottom
RBG26  3.3k  [R0402]  89.25,43.2 0 bottom
RBG27  3.3k  [R0402]  89.25,46.95 0 bottom
RBG28  3.3k  [R0402]  89.25,50.7 0 bottom
RBG29  3.3k  [R0402]  89.25,54.45 0 bottom
RBG30  3.3k  [R0402]  89.25,58.2 0 bottom
RBG31  3.3k  [R0402]  89.25,61.95 0 bottom
RBG32  3.3k  [R0402]  89.25,65.7 0 bottom
RBG33  3.3k  [R0402]  89.25,69.45 0 bottom
RBG34  3.3k  [R0402]  89.25,73.2 0 bottom
RBG35  3.3k  [R0402]  89.25,76.65 0 bottom
RBG36  3.3k  [R0402]  88.8,78.15 0 bottom
RBG37  3.3k  [R0402]  119.75,39.98 0 bottom
RBG38  3.3k  [R0402]  119.75,43.2 0 bottom
RBG39  3.3k  [R0402]  119.75,46.95 0 bottom
RBG40  3.3k  [R0402]  119.75,50.7 0 bottom
RBG41  3.3k  [R0402]  119.75,54.45 0 bottom
RBG42  3.3k  [R0402]  119.75,58.2 0 bottom
RBG43  3.3k  [R0402]  119.75,61.95 0 bottom
RBG44  3.3k  [R0402]  119.75,65.7 0 bottom
RBG45  3.3k  [R0402]  119.75,69.45 0 bottom
RBG46  3.3k  [R0402]  119.75,73.2 0 bottom
RBG47  3.3k  [R0402]  119.75,76.65 0 bottom
RBG48  3.3k  [R0402]  119.3,78.15 0 bottom
RCM1  100  [R0402]  28.4,40.45 0 top
RCM2  100  [R0402]  28.4,44.2 0 top
RCM3  100  [R0402]  28.4,47.95 0 top
RCM4  100  [R0402]  28.4,51.7 0 top
RCM5  100  [R0402]  28.4,55.45 0 top
RCM6  100  [R0402]  28.4,59.2 0 top
RCM7  100  [R0402]  28.4,62.95 0 top
RCM8  100  [R0402]  28.4,66.7 0 top
RCM9  100  [R0402]  28.4,70.45 0 top
RCM10  100  [R0402]  28.4,74.25 0 top
RCM11  100  [R0402]  28.4,78 0 top
RCM12  100  [R0402]  32,75.42 180 top
RCM13  100  [R0402]  58.9,40.45 0 top
RCM14  100  [R0402]  58.9,44.2 0 top
RCM15  100  [R0402]  58.9,47.95 0 top
RCM16  100  [R0402]  58.9,51.7 0 top
RCM17  100  [R0402]  58.9,55.45 0 top
RCM18  100  [R0402]  58.9,59.2 0 top
RCM19  100  [R0402]  58.9,62.95 0 top
RCM20  100  [R0402]  58.9,66.7 0 top
RCM21  100  [R0402]  58.9,70.45 0 top
RCM22  100  [R0402]  58.9,74.25 0 top
RCM23  100  [R0402]  58.9,78 0 top
RCM24  100  [R0402]  62.5,75.42 180 top
RCM25  100  [R0402]  89.4,40.45 0 top
RCM26  100  [R0402]  89.4,44.2 0 top
RCM27  100  [R0402]  89.4,47.95 0 top
RCM28  100  [R0402]  89.4,51.7 0 top
RCM29  100  [R0402]  89.4,55.45 0 top
RCM30  100  [R0402]  89.4,59.2 0 top
RCM31  100  [R0402]  89.4,62.95 0 top
RCM32  100  [R0402]  89.4,66.7 0 top
RCM33  100  [R0402]  89.4,70.45 0 top
RCM34  100  [R0402]  89.4,74.25 0 top
RCM35  100  [R0402]  89.4,78 0 top
RCM36  100  [R0402]  93,75.42 180 top
RCM37  100  [R0402]  119.9,40.45 0 top
RCM38  100  [R0402]  119.9,44.2 0 top
RCM39  100  [R0402]  119.9,47.95 0 top
RCM40  100  [R0402]  119.9,51.7 0 top
RCM41  100  [R0402]  119.9,55.45 0 top
RCM42  100  [R0402]  119.9,59.2 0 top
RCM43  100  [R0402]  119.9,62.95 0 top
RCM44  100  [R0402]  119.9,66.7 0 top
RCM45  100  [R0402]  119.9,70.45 0 top
RCM46  100  [R0402]  119.9,74.25 0 top
RCM47  100  [R0402]  119.9,78 0 top
RCM48  100  [R0402]  123.5,75.42 180 top
REG5_C1  100n,>=25V,>=X5R  [C0402]  63,19.3 270 bottom
REG5_C2  100n,>=25V,>=X5R  [C0402]  32.5,19.3 270 bottom
REG5_C3  47u,10V,X7R  [C1210]  37.35,21.65 180 top
REG5_C4  2.2u,50V,X7R  [C0805]  31.98,14.72 0 top
REG5_C5  47u,10V,X7R  [C1210]  67.85,21.65 180 top
REG5_C6  2.2u,50V,X7R  [C0805]  28.98,20.05 90 top
REG5_C7  2.2u,50V,X7R  [C0805]  62.48,14.72 0 top
REG5_C8  2.2u,50V,X7R  [C0805]  59.48,20.05 90 top
REG5_C9  100n,>=25V,>=X5R  [C0402]  93.5,19.3 270 bottom
REG5_C10  47u,10V,X7R  [C1210]  98.35,21.65 180 top
REG5_C11  2.2u,50V,X7R  [C0805]  92.97,14.72 0 top
REG5_C12  2.2u,50V,X7R  [C0805]  89.97,20.05 90 top
REG5_C13  100n,>=25V,>=X5R  [C0402]  124,19.3 270 bottom
REG5_C14  47u,10V,X7R  [C1210]  128.85,21.65 180 top
REG5_C15  2.2u,50V,X7R  [C0805]  123.47,14.72 0 top
REG5_C16  2.2u,50V,X7R  [C0805]  120.47,20.05 90 top
REG5_D1  PMEG6010CEH  [SOD123]  64.6,20.18 90 top
REG5_D2  PMEG6010CEH  [SOD123]  34.1,20.18 90 top
REG5_D3  PMEG6010CEH  [SOD123]  95.1,20.18 90 top
REG5_D4  PMEG6010CEH  [SOD123]  125.6,20.18 90 top
REG5_L  744025100  [WE-TPC_2828]  37.2,18.05 90 top
REG5_L1  744025100  [WE-TPC_2828]  67.7,18.05 90 top
REG5_L2  744025100  [WE-TPC_2828]  98.2,18.05 90 top
REG5_L3  744025100  [WE-TPC_2828]  128.7,18.05 90 top
RGQ1_1  1M,50V  [R0603]  21.89,77.07 0 bottom
RGQ1_2  100k,50V  [R0603]  17.82,78.11 90 bottom
RGQ1_3  1M  [R0402]  17.05,70.83 180 bottom
RGQ1_4  1M,50V  [R0603]  52.39,77.07 0 bottom
RGQ1_5  100k,50V  [R0603]  48.32,78.11 90 bottom
RGQ1_6  1M  [R0402]  47.55,70.83 180 bottom
RGQ1_7  1M,50V  [R0603]  82.89,77.07 0 bottom
RGQ1_8  100k,50V  [R0603]  78.82,78.11 90 bottom
RGQ1_9  1M  [R0402]  78.05,70.83 180 bottom
RGQ1_10  1M,50V  [R0603]  113.39,77.07 0 bottom
RGQ1_11  100k,50V  [R0603]  109.32,78.11 90 bottom
RGQ1_12  1M  [R0402]  108.55,70.83 180 bottom
RP1  22  [MINI_MELF-0207R]  23.9,36.25 180 top
RP2  22  [MINI_MELF-0207R]  23.9,40 0 top
RP3  22  [MINI_MELF-0207R]  23.9,43.75 180 top
RP4  22  [MINI_MELF-0207R]  23.9,47.5 0 top
RP5  22  [MINI_MELF-0207R]  23.9,51.25 180 top
RP6  22  [MINI_MELF-0207R]  23.9,55 0 top
RP7  22  [MINI_MELF-0207R]  23.9,58.75 180 top
RP8  22  [MINI_MELF-0207R]  23.9,62.5 0 top
RP9  22  [MINI_MELF-0207R]  23.9,66.25 180 top
RP10  22  [MINI_MELF-0207R]  23.9,70 0 top
RP11  22  [MINI_MELF-0207R]  23.9,73.75 180 top
RP12  22  [MINI_MELF-0207R]  23.9,77.5 0 top
RP13  22  [MINI_MELF-0207R]  54.4,36.25 180 top
RP14  22  [MINI_MELF-0207R]  54.4,40 0 top
RP15  22  [MINI_MELF-0207R]  54.4,43.75 180 top
RP16  22  [MINI_MELF-0207R]  54.4,47.5 0 top
RP17  22  [MINI_MELF-0207R]  54.4,51.25 180 top
RP18  22  [MINI_MELF-0207R]  54.4,55 0 top
RP19  22  [MINI_MELF-0207R]  54.4,58.75 180 top
RP20  22  [MINI_MELF-0207R]  54.4,62.5 0 top
RP21  22  [MINI_MELF-0207R]  54.4,66.25 180 top
RP22  22  [MINI_MELF-0207R]  54.4,70 0 top
RP23  22  [MINI_MELF-0207R]  54.4,73.75 180 top
RP24  22  [MINI_MELF-0207R]  54.4,77.5 0 top
RP25  22  [MINI_MELF-0207R]  84.9,36.25 180 top
RP26  22  [MINI_MELF-0207R]  84.9,40 0 top
RP27  22  [MINI_MELF-0207R]  84.9,43.75 180 top
RP28  22  [MINI_MELF-0207R]  84.9,47.5 0 top
RP29  22  [MINI_MELF-0207R]  84.9,51.25 180 top
RP30  22  [MINI_MELF-0207R]  84.9,55 0 top
RP31  22  [MINI_MELF-0207R]  84.9,58.75 180 top
RP32  22  [MINI_MELF-0207R]  84.9,62.5 0 top
RP33  22  [MINI_MELF-0207R]  84.9,66.25 180 top
RP34  22  [MINI_MELF-0207R]  84.9,70 0 top
RP35  22  [MINI_MELF-0207R]  84.9,73.75 180 top
RP36  22  [MINI_MELF-0207R]  84.9,77.5 0 top
RP37  22  [MINI_MELF-0207R]  115.4,36.25 180 top
RP38  22  [MINI_MELF-0207R]  115.4,40 0 top
RP39  22  [MINI_MELF-0207R]  115.4,43.75 180 top
RP40  22  [MINI_MELF-0207R]  115.4,47.5 0 top
RP41  22  [MINI_MELF-0207R]  115.4,51.25 180 top
RP42  22  [MINI_MELF-0207R]  115.4,55 0 top
RP43  22  [MINI_MELF-0207R]  115.4,58.75 180 top
RP44  22  [MINI_MELF-0207R]  115.4,62.5 0 top
RP45  22  [MINI_MELF-0207R]  115.4,66.25 180 top
RP46  22  [MINI_MELF-0207R]  115.4,70 0 top
RP47  22  [MINI_MELF-0207R]  115.4,73.75 180 top
RP48  22  [MINI_MELF-0207R]  115.4,77.5 0 top
RV1  24V  [R0603]  31.98,12.93 0 top
RV2  24V  [R0603]  17.8,14.57 180 bottom
RV3  24V  [R0603]  17.8,16.07 180 bottom
RV4  24V  [R0603]  62.48,12.93 0 top
RV5  24V  [R0603]  48.3,14.57 180 bottom
RV6  24V  [R0603]  48.3,16.07 180 bottom
RV7  24V  [R0603]  92.97,12.93 0 top
RV8  24V  [R0603]  78.8,14.57 180 bottom
RV9  24V  [R0603]  78.8,16.07 180 bottom
RV10  24V  [R0603]  123.47,12.93 0 top
RV11  24V  [R0603]  109.3,14.57 180 bottom
RV12  24V  [R0603]  109.3,16.07 180 bottom
U$1  [SMLOGOS_BSILK]  56.02,54.8 90 top
U$2  [SMLOGOS_SILK]  49.27,56.95 90 top
U$3  [SMLOGOS_BSILK]  25.52,54.8 90 top
U$4  [SMLOGOS_SILK]  18.77,56.95 90 top
U$5  [SMLOGOS_BSILK]  86.53,54.8 90 top
U$6  [SMLOGOS_SILK]  79.78,56.95 90 top
U$7  [SMLOGOS_BSILK]  117.03,54.8 90 top
U$8  [SMLOGOS_SILK]  110.28,56.95 90 top
V+R  100  [R0603]  34.23,67.24 180 bottom
V+R1  100  [R0603]  64.73,67.24 180 bottom
V+R2  100  [R0603]  95.23,67.24 180 bottom
V+R3  100  [R0603]  125.73,67.24 180 bottom
V-R  100  [R0603]  33.1,59.65 270 bottom
V-R1  100  [R0603]  63.6,59.65 270 bottom
V-R2  100  [R0603]  94.1,59.65 270 bottom
V-R3  100  [R0603]  124.6,59.65 270 bottom
X1  504050-0791  [504050-0791]  33.5,66.3 270 top
X2  504050-0691  [504050-0691]  16.5,66.3 90 top
X3  504050-0491  [504050-0491]  25,16.45 180 top
X4  504050-0491  [504050-0491]  25,16.45 180 bottom
X5  504050-1291  [504050-1291]  16.5,46 90 top
X6  504050-1291  [504050-1291]  33.5,46 270 top
X7  504050-0691  [504050-0691]  47,66.3 90 top
X8  504050-0791  [504050-0791]  64,66.3 270 top
X9  504050-1291  [504050-1291]  47,46 90 top
X10  504050-1291  [504050-1291]  64,46 270 top
X11  504050-0491  [504050-0491]  55.5,16.45 180 top
X12  504050-0491  [504050-0491]  55.5,16.45 180 bottom
X13  504050-0691  [504050-0691]  77.5,66.3 90 top
X14  504050-0791  [504050-0791]  94.5,66.3 270 top
X15  504050-1291  [504050-1291]  77.5,46 90 top
X16  504050-1291  [504050-1291]  94.5,46 270 top
X17  504050-0491  [504050-0491]  86,16.45 180 top
X18  504050-0491  [504050-0491]  86,16.45 180 bottom
X19  504050-0691  [504050-0691]  108,66.3 90 top
X20  504050-0791  [504050-0791]  125,66.3 270 top
X21  504050-1291  [504050-1291]  108,46 90 top
X22  504050-1291  [504050-1291]  125,46 270 top
X23  504050-0491  [504050-0491]  116.5,16.45 180 top
X24  504050-0491  [504050-0491]  116.5,16.45 180 bottom
Y1  12Mhz  [MT]  34.81,32.75 270 top
Y2  12Mhz  [MT]  65.31,32.75 270 top
Y3  12Mhz  [MT]  95.81,32.75 270 top
Y4  12Mhz  [MT]  126.31,32.75 270 top

## Library data of the parts
C1-C64 CCM1-CCM48 CVREF CVREF1-CVREF3 CVREG CVREG1-CVREG3 D1-D8 DBG1-DBG4 DCM1-DCM48 DT1-DT24 IC1 IC3 IC5-IC8 IC11-IC15 IC18-IC22 IC25-IC28 LED1-LED8 NTC_C1-NTC_C48 NTC_R1-NTC_R48 Q1-Q8 QB1-QB48 R1-R54 R59 R60 RBG1-RBG48 RCM1-RCM48 REG5_C1-REG5_C16 RGQ1_1-RGQ1_12 RP1-RP48 RV1-RV12 V+R V+R1-V+R3 V-R V-R1-V-R3 Y1-Y4 = phrenetic
FID1-FID28 = microbuilder
IC2 IC4 IC9 IC10 IC16 IC17 IC23 IC24 U$2 U$4 U$6 U$8 = bms-hsrm
L1-L12 REG5_L REG5_L1-REG5_L3 = EagleLibrary_Wuerth_Elektronik_eiSos_Version_6
REG5_D1-REG5_D4 = semicon-smd-ipc
U$1 U$3 U$5 U$7 = spr-logo
X1-X24 = con-molex-picolock